# Altium PCB 底板20160428.PcbDoc (part 1 of 5)
Units mm, origin at the board's own origin, x right, y up, seen from the top; angles counter-clockwise.
Board outline 123.72 x 102.71 mm, 2 copper layers (Top Layer, Bottom Layer); 224 components, 227 nets, 768 pads, 282 vias.
Unrouted connection lines stored in the file: 2.
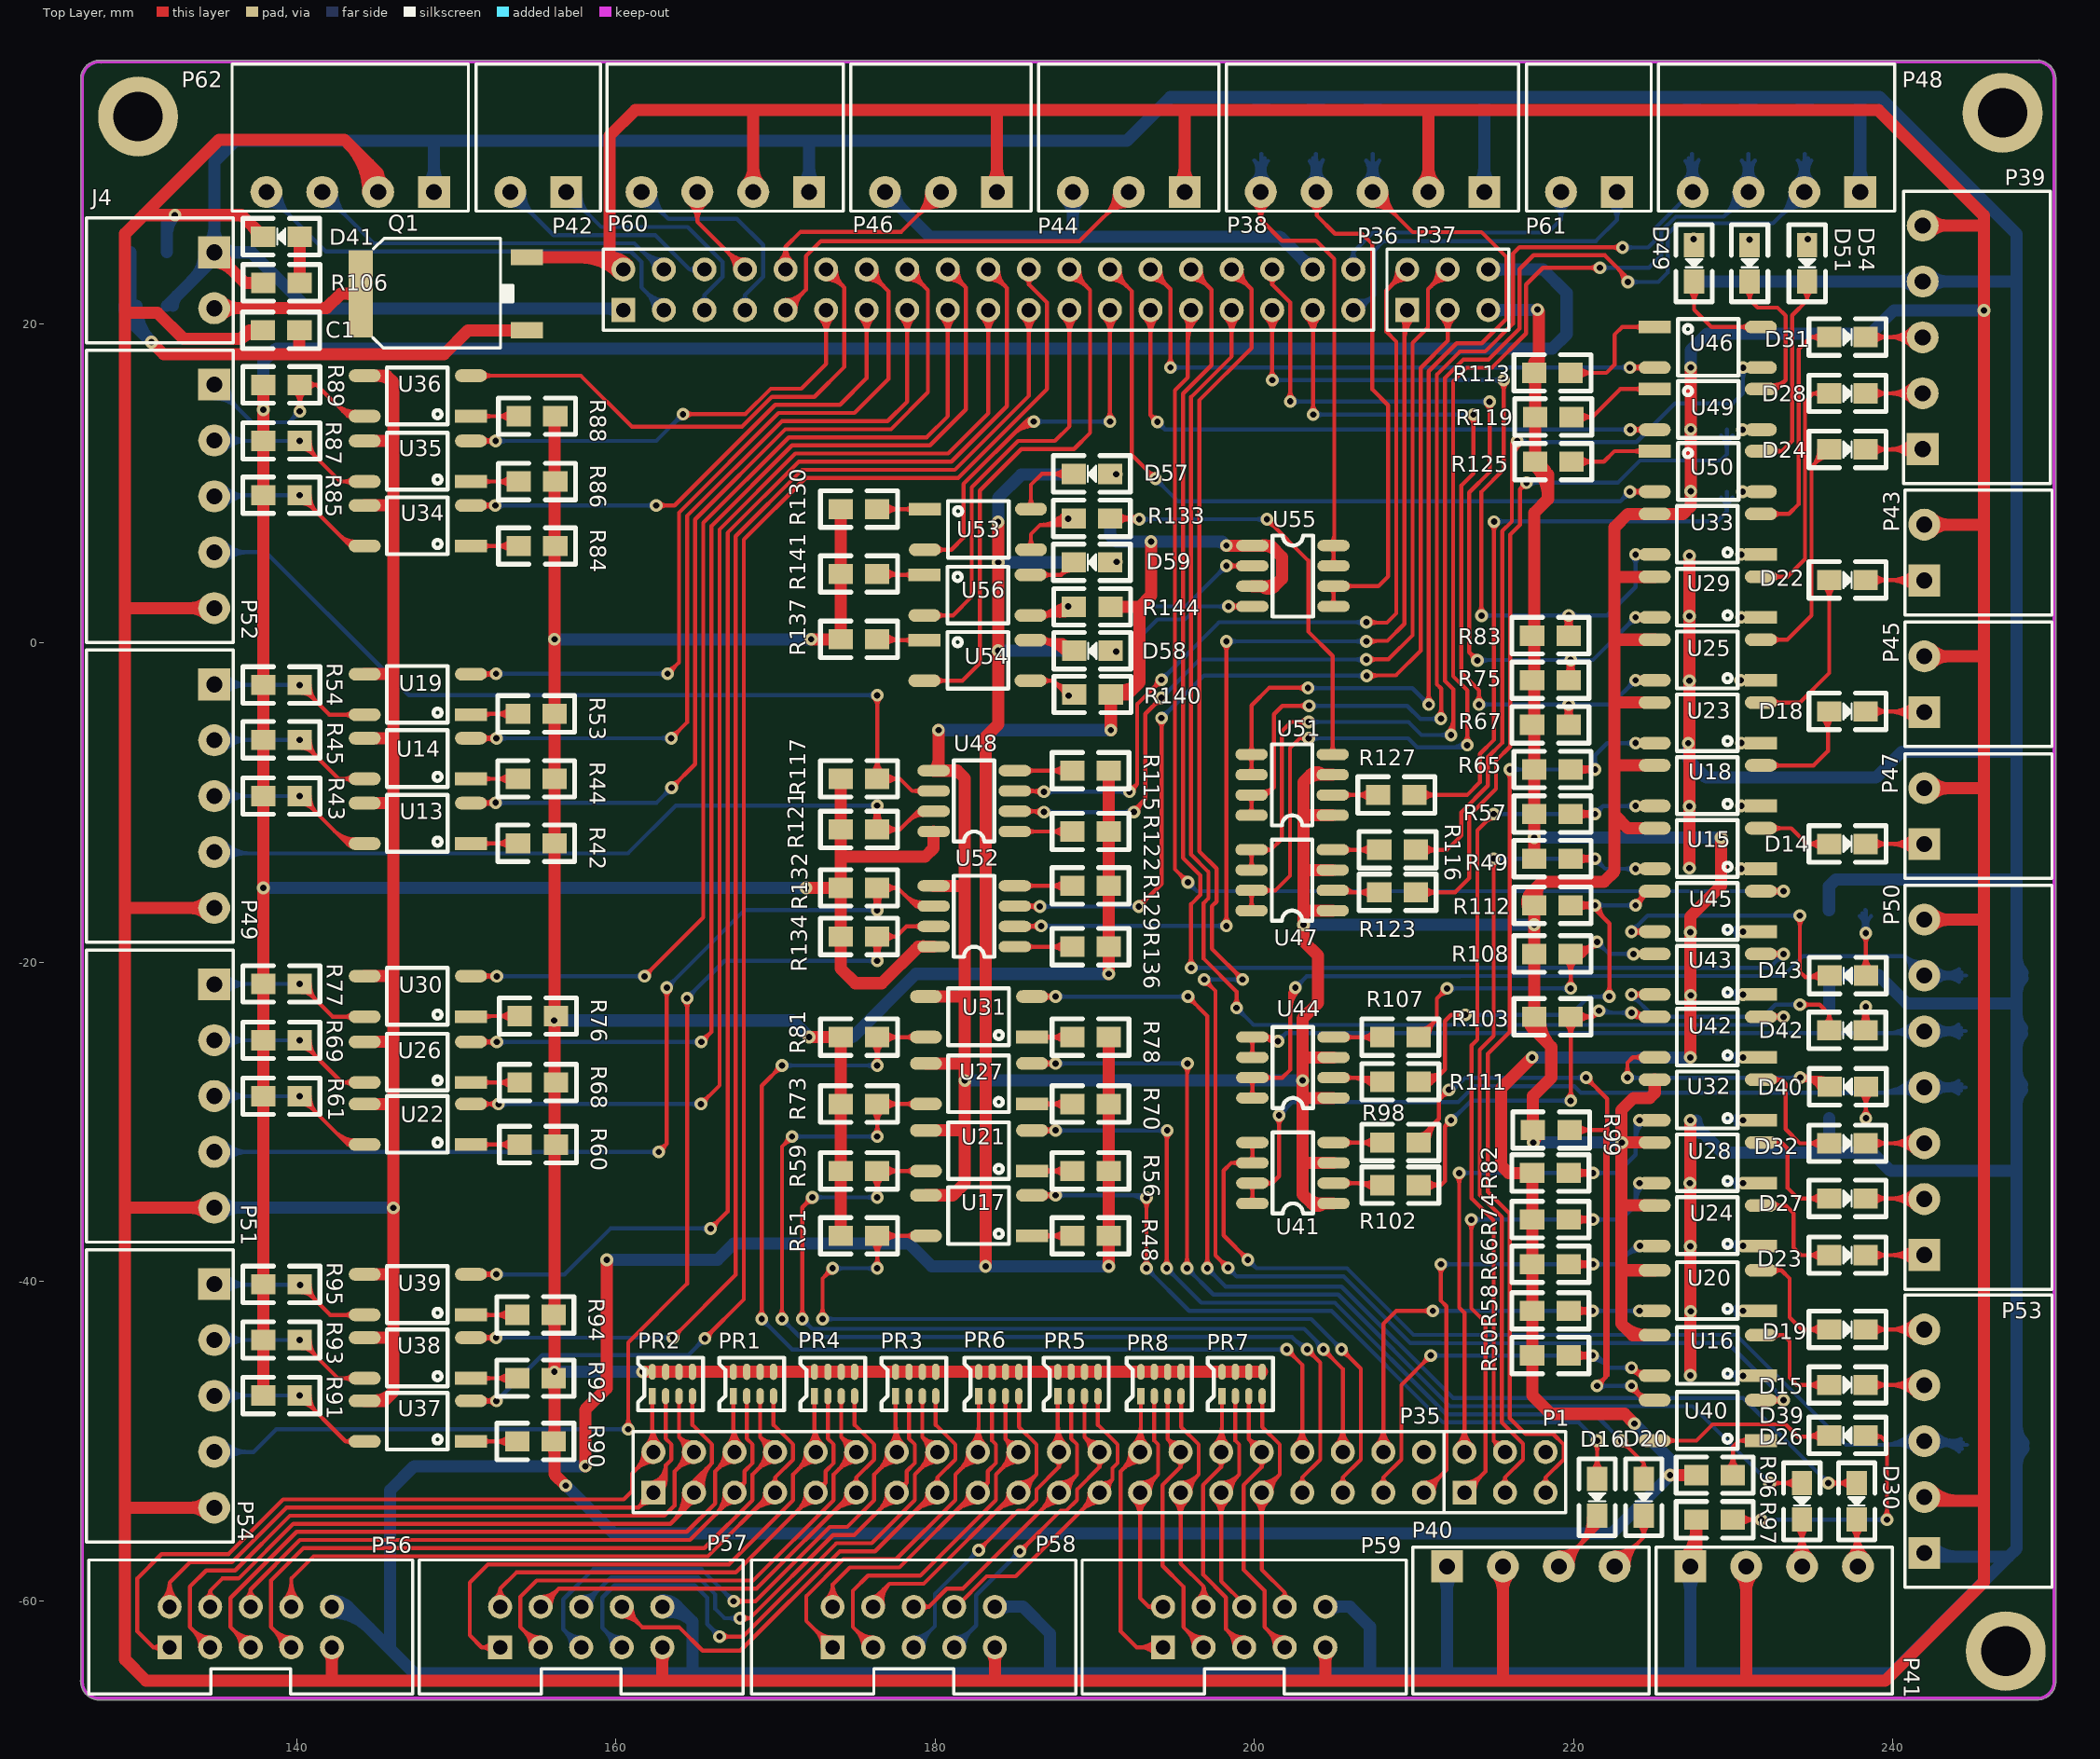
[diagram p0: Top Layer view]
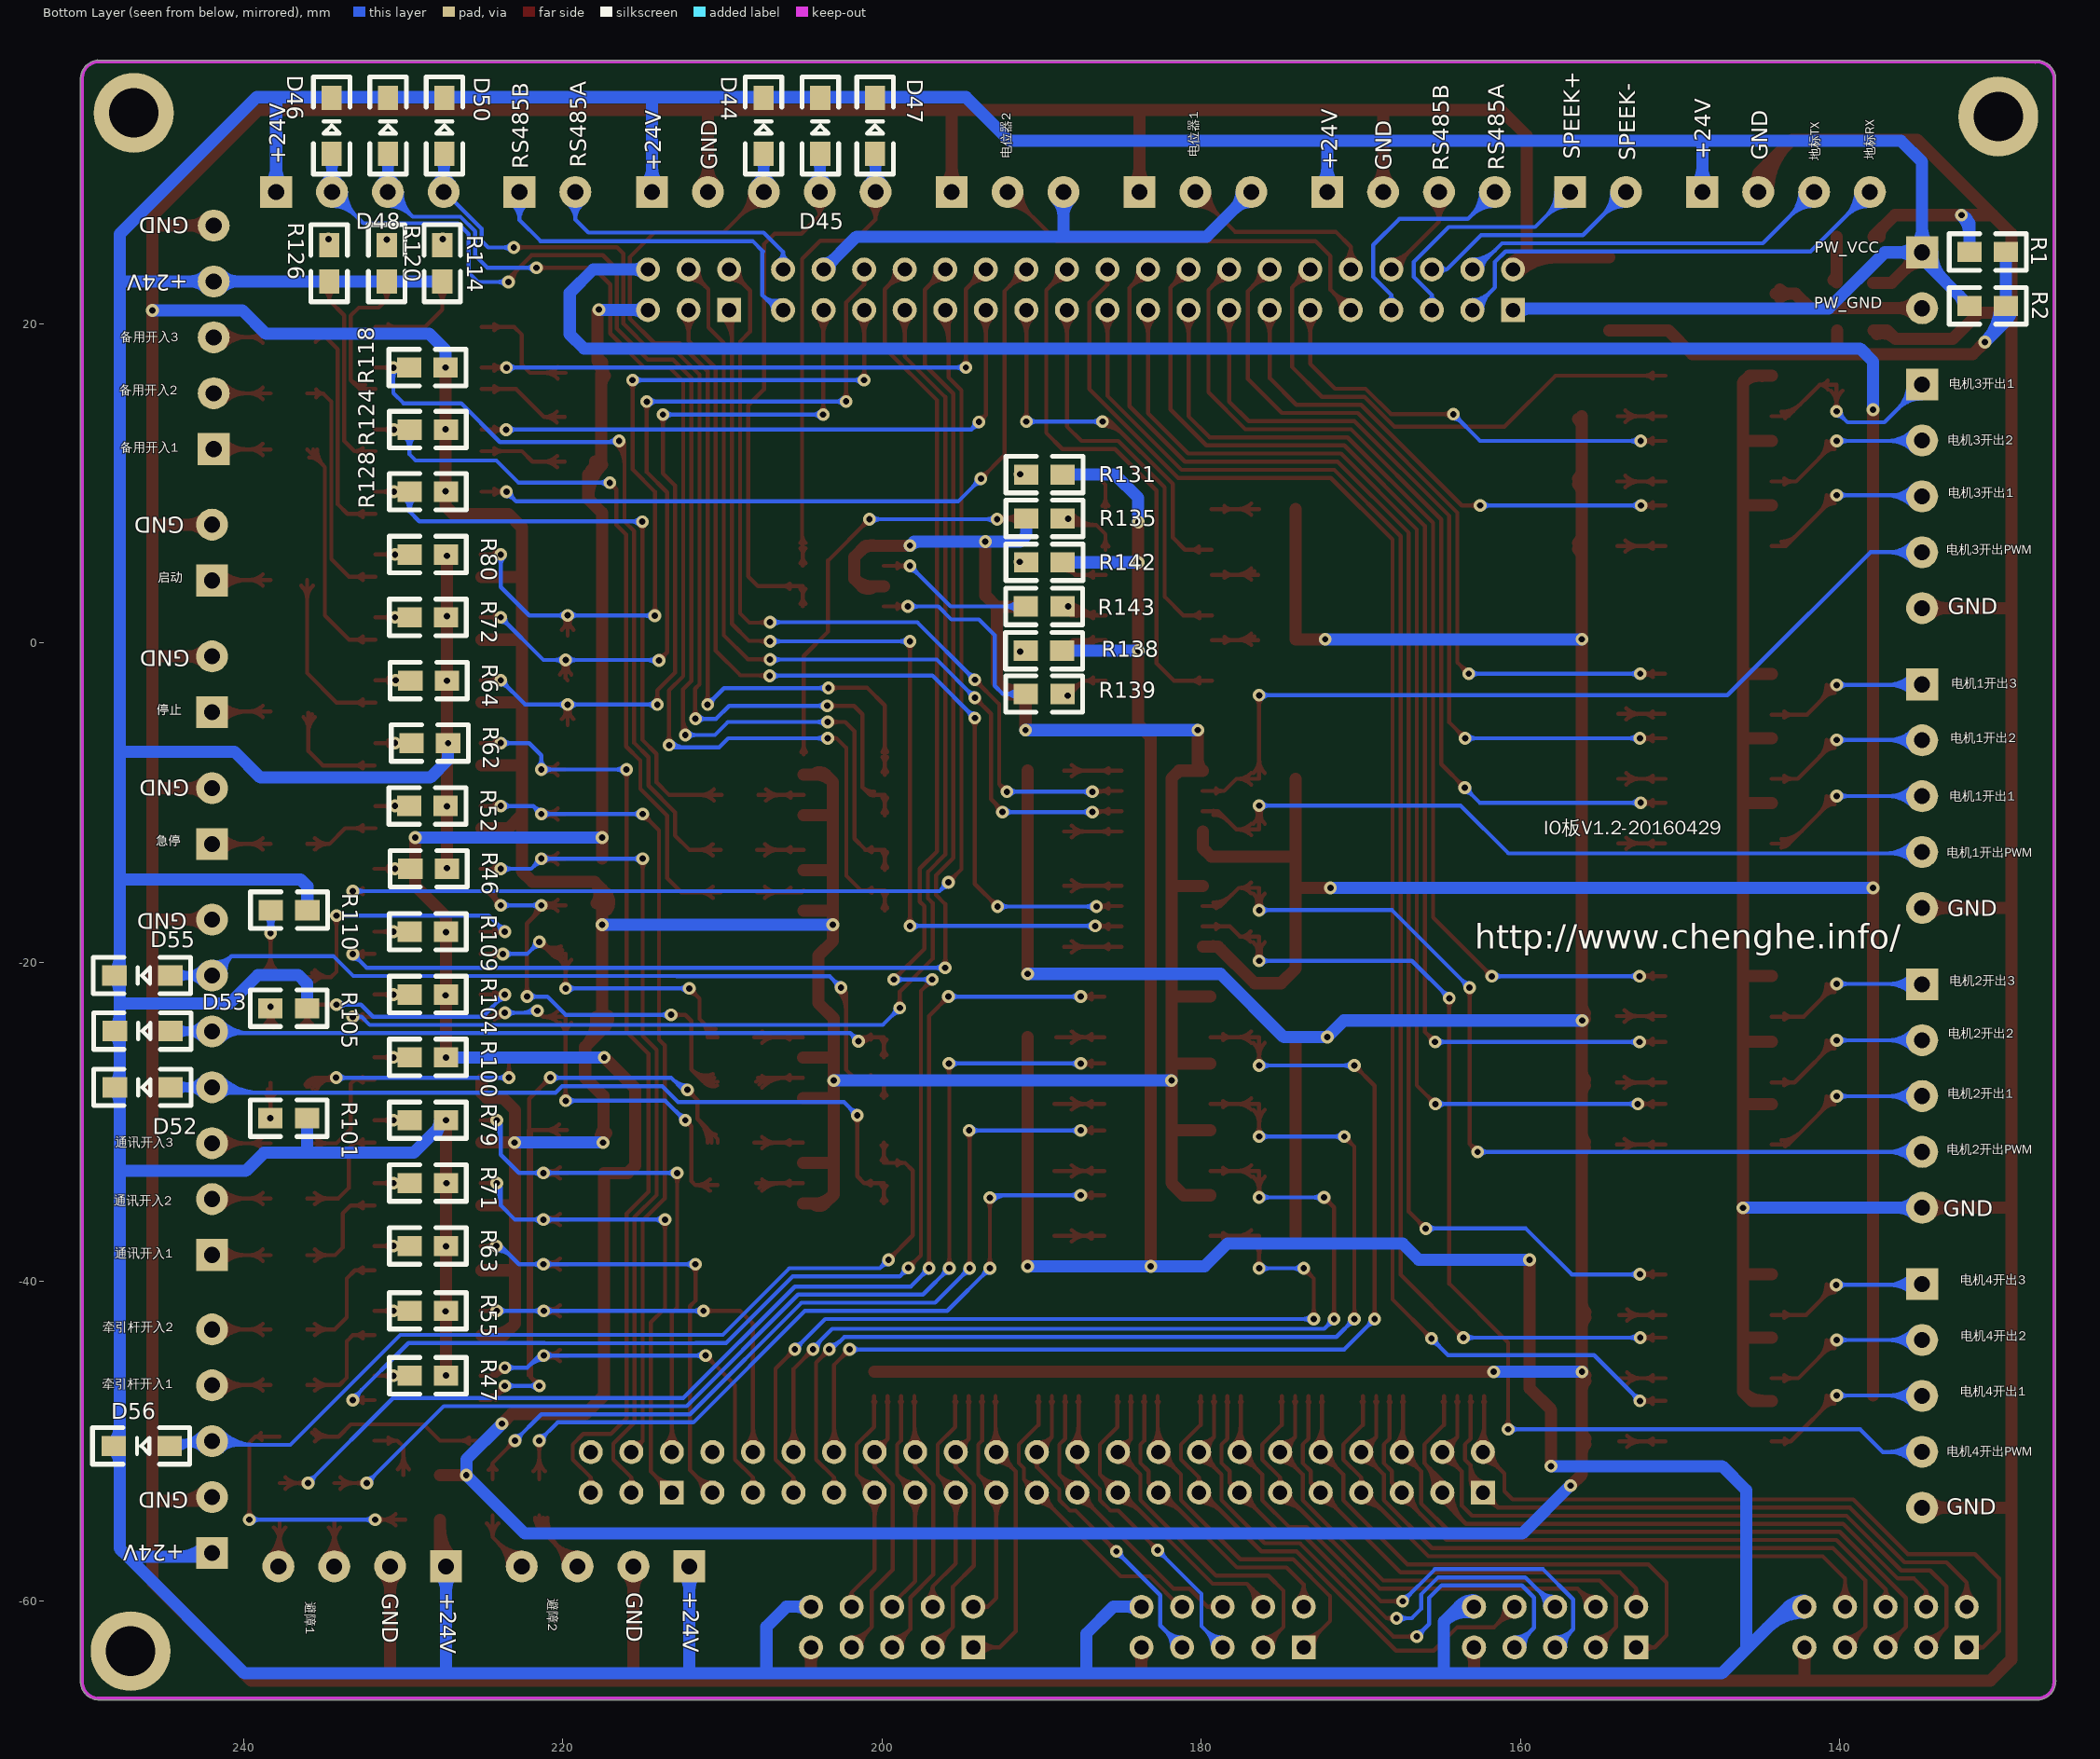
[diagram p1: Bottom Layer view, seen from below]

## Layer stack, top to bottom
Top Layer: signal copper 0.0356
Dielectric: dielectric 0.32, FR-4, Dk 4.8
Bottom Layer: signal copper 0.0356

## Board outline
126.483,-64.918 ccw(c127.645,-65.04) 127.489,-66.198 ccw(c127.519,-66.102) 127.519,-66.202 248.915,-66.202 ccw(c249.031,-65.04) 250.193,-65.161 ccw(c250.094,-65.151) 250.194,-65.151 250.194,35.303 ccw(c249.026,35.341) 250.195,35.341 ccw(c249.026,35.341) 250.194,35.379 250.194,35.428 ccw(c250.094,35.428) 250.189,35.461 ccw(c249.026,35.341) 249.148,36.503 ccw(c249.138,36.403) 249.106,36.499 127.533,36.499 ccw(c127.533,36.398) 127.47,36.476 ccw(c127.651,35.322) 126.489,35.443 ccw(c126.588,35.433) 126.493,35.401 126.493,-64.883 ccw(c126.583,-64.928)

## Design rules (kind name [scope] priority, off if disabled: settings)
Clearance [All] p1: gap=0.152
HoleToHoleClearance [All] p1: gap=0.152 allowstackedmicrovias=TRUE
MinimumSolderMaskSliver [All] p1: minsoldermaskwidth=0.051
PolygonConnect [All] p1: connectstyle=Relief reliefconductorwidth=0.254 reliefentries=4 polygonreliefangle="90 Angle"
RoutingVias [All] p1: holewidth=0.711 width=1.27 viastyle="Through Hole" minholewidth=0.711 minwidth=1.27 maxholewidth=0.711 maxwidth=1.27
SilkToSilkClearance [All] p1: silktosilkclearance=-1
SilkscreenOverComponentPads [All] p1: minsilkscreentomaskgap=-1
SolderMaskExpansion [All] p1: expansion=0.102
Width [All] p1: maxlimit=1.27 minlimit=0.254 preferedwidth=0.254
24 further rules are at their usual default settings.

## Components (designator, comment, footprint, x,y, rotation, side; value= is the part's Value field where it differs from the comment)
C1 "104" 0805 137.897,19.583 r0 top
D14 "" LED 236.017,-12.598 r0 top
D15 "" LED 236.017,-46.482 r0 top
D16 "" LED 221.463,-52.375 r270 top
D18 "" LED 236.017,-4.293 r0 top
D19 "" LED 236.017,-43.002 r0 top
D20 "" LED 224.384,-52.375 r270 top
D22 "" LED 236.017,3.937 r0 top
D23 "" LED 236.017,-38.354 r0 top
D24 "" LED 236.017,12.116 r0 top
D26 "" LED 234.29,-52.629 r270 top
D27 "" LED 236.017,-34.798 r0 top
D28 "" LED 236.017,15.621 r0 top
D30 "" LED 237.719,-52.629 r270 top
D31 "" LED 236.017,19.152 r0 top
D32 "" LED 236.017,-31.344 r0 top
D39 "" LED 238.287,-49.632 r180 top
D40 "" LED 238.303,-27.788 r180 top
D41 "" LED 140.183,25.451 r180 top
D42 "" LED 238.277,-24.257 r180 top
D43 "" LED 238.303,-20.828 r180 top
D44 "" DIDOE 207.416,30.632 r90 bottom
D45 "" DIDOE 203.86,30.632 r90 bottom
D46 "" DIDOE 234.467,30.632 r90 bottom
D47 "" DIDOE 200.431,30.632 r90 bottom
D48 "" DIDOE 230.937,30.632 r90 bottom
D49 "" LED 227.533,24.917 r270 top
D50 "" DIDOE 227.406,30.632 r90 bottom
D51 "" LED 231.013,24.917 r270 top
D52 "" DIDOE 244.551,-27.838 r0 bottom
D53 "" DIDOE 244.551,-24.308 r0 bottom
D54 "" LED 234.62,24.917 r270 top
D55 "" DIDOE 244.577,-20.828 r0 bottom
D56 "" DIDOE 244.627,-50.292 r0 bottom
D57 "" LED 190.957,10.592 r180 top
D58 "" LED 190.983,-0.483 r180 top
D59 "" LED 190.957,5.055 r180 top
J4 "CON2" DZ-2-3.5 134.849,24.46 r270 top
P1 "Header 3X2H" HDR2X3 213.157,-53.213 r0 top locked
P35 "MHDR2X20" DIP-2X20 162.357,-53.213 r0 top locked
P36 "MHDR2X19" DIP-2X19 160.477,20.853 r0 top locked
P37 "Header 3X2H" HDR2X3 209.575,20.853 r0 top
P38 "输出备用" DZ-5-3.5 214.401,28.245 r180 top
P39 "输入备用" DZ-5-3.5 241.859,12.141 r90 top
P40 "避障2" DZ-4-3.5 212.065,-57.836 r0 top
P41 "避障1" DZ-4-3.5 227.305,-57.836 r0 top
P42 "喇叭" DZ-2-3.5 156.896,28.245 r180 top
P43 "启动" DZ-2-3.5 241.96,3.912 r90 top
P44 "电位器1" DZ-3-3.5 195.631,28.245 r180 top
P45 "停止" DZ-2-3.5 241.96,-4.343 r90 top
P46 "电位器2" DZ-3-3.5 183.871,28.245 r180 top
P47 "急停" DZ-2-3.5 241.96,-12.598 r90 top
P48 "三色灯" DZ-4-3.5 237.947,28.245 r180 top
P49 "电机1" DZ-5-3.5 134.849,-2.599 r270 top
P50 "通讯IO" DZ-7-3.5 241.96,-38.329 r90 top
P51 "电机2" DZ-5-3.5 134.849,-21.378 r270 top
P52 "电机3" DZ-5-3.5 134.849,16.181 r270 top
P53 "牵引杆" DZ-5-3.5 241.96,-56.998 r90 top
P54 "电机4" DZ-5-3.5 134.849,-40.157 r270 top
P56 "磁导航1" HDR2X5 132.055,-62.906 r0 top
P57 "磁导航2" HDR2X5 152.756,-62.906 r0 top
P58 "磁导航3" HDR2X5 173.584,-62.906 r0 top
P59 "磁导航4" HDR2X5 194.285,-62.906 r0 top
P60 "触摸屏RS485" DZ-4-3.5 172.11,28.245 r180 top
P61 "应用板通讯" DZ-2-3.5 222.707,28.245 r180 top
P62 "RFID_RS232" DZ-4-3.5 148.615,28.245 r180 top
PR1 "PZ" SOP8 167.361,-47.041 r90 top
PR2 "PZ" SOP8 162.281,-47.041 r90 top
PR3 "PZ" SOP8 177.521,-47.041 r90 top
PR4 "PZ" SOP8 172.441,-47.041 r90 top
PR5 "PZ" SOP8 187.681,-47.041 r90 top
PR6 "PZ" SOP8 182.728,-47.041 r90 top
PR7 "PZ" SOP8 197.968,-47.041 r90 top
PR8 "PZ" SOP8 192.888,-47.041 r90 top
Q1 "IRFR1205" TO-252AA 154.432,19.583 r90 top
R1 "1k" 0805 129.591,24.486 r0 bottom
R2 "2k" 0805 129.591,21.107 r0 bottom
R42 "102" 0805 153.873,-12.548 r0 top
R43 "472" 0805 140.2,-9.594 r180 top
R44 "102" 0805 153.873,-8.509 r0 top
R45 "472" 0805 140.2,-6.071 r180 top
R46 "472" 0805 229.54,-14.148 r180 bottom
R47 "472" 0805 229.591,-45.898 r180 bottom
R48 "472" 0805 188.595,-37.135 r0 top
R49 "102" 0805 219.812,-13.513 r180 top
R50 "102" 0805 219.685,-44.628 r180 top
R51 "102" 0805 176.378,-37.135 r180 top
R52 "472" 0805 229.616,-10.211 r180 bottom
R53 "102" 0805 153.873,-4.445 r0 top
R54 "472" 0805 140.2,-2.635 r180 top
R55 "472" 0805 229.591,-41.834 r180 bottom
R56 "472" 0805 188.595,-33.071 r0 top
R57 "102" 0805 219.812,-10.719 r180 top
R58 "102" 0805 219.685,-41.834 r180 top
R59 "102" 0805 176.378,-33.071 r180 top
R60 "102" 0805 153.975,-31.42 r0 top
R61 "472" 0805 140.2,-28.39 r180 top
R62 "472" 0805 229.464,-6.274 r180 bottom
R63 "472" 0805 229.591,-37.77 r180 bottom
R64 "472" 0805 229.54,-2.362 r180 bottom
R65 "102" 0805 219.812,-7.925 r180 top
R66 "102" 0805 219.685,-38.913 r180 top
R67 "102" 0805 219.685,-5.131 r180 top
R68 "102" 0805 153.975,-27.534 r0 top
R69 "472" 0805 140.2,-24.885 r180 top
R70 "472" 0805 188.595,-28.88 r0 top
R71 "472" 0805 229.591,-33.833 r180 bottom
R72 "472" 0805 229.591,1.6 r180 bottom
R73 "102" 0805 176.378,-28.88 r180 top
R74 "102" 0805 219.685,-36.119 r180 top
R75 "102" 0805 219.685,-2.337 r180 top
R76 "102" 0805 153.975,-23.368 r0 top
R77 "472" 0805 140.2,-21.355 r180 top
R78 "472" 0805 188.595,-24.689 r0 top
R79 "472" 0805 229.591,-29.896 r180 bottom
R80 "472" 0805 229.591,5.537 r180 bottom
R81 "102" 0805 176.378,-24.689 r180 top
R82 "102" 0805 219.685,-33.198 r180 top
R83 "102" 0805 219.685,0.457 r180 top
R84 "102" 0805 153.924,6.071 r0 top
R85 "472" 0805 140.2,9.252 r180 top
R86 "102" 0805 153.924,10.109 r0 top
R87 "472" 0805 140.2,12.656 r180 top
R88 "102" 0805 153.924,14.199 r0 top
R89 "472" 0805 140.2,16.161 r180 top
R90 "102" 0805 153.822,-50.013 r0 top
R91 "472" 0805 140.2,-47.136 r180 top
R92 "102" 0805 153.822,-46.05 r0 top
R93 "472" 0805 140.2,-43.656 r180 top
R94 "102" 0805 153.822,-42.088 r0 top
R95 "472" 0805 140.2,-40.176 r180 top
R96 "102" 0805 229.972,-52.121 r180 top
R97 "472" 0805 229.972,-54.915 r180 top
R98 "102" 0805 208.001,-31.293 r0 top
R99 "472" 0805 217.449,-30.505 r0 top
R100 "102" 0805 229.591,-25.959 r180 bottom
R101 "472" 0805 238.303,-29.769 r180 bottom
R102 "102" 0805 208.001,-33.96 r0 top
R103 "472" 0805 217.526,-23.419 r0 top
R104 "102" 0805 229.591,-22.022 r180 bottom
R105 "472" 0805 238.303,-22.885 r180 bottom
R106 "472" 0805 137.922,22.555 r0 top
R107 "102" 0805 208.001,-24.689 r0 top
R108 "472" 0805 217.526,-19.482 r0 top
R109 "102" 0805 229.591,-18.085 r180 bottom
R110 "472" 0805 238.277,-16.739 r180 bottom
R111 "102" 0805 208.001,-27.483 r0 top
R112 "472" 0805 217.526,-16.434 r0 top
R113 "102" 0805 219.812,16.916 r180 top
R114 "472" 0805 227.54,24.925 r270 bottom
R115 "330R" 0805 188.595,-8.001 r0 top
R116 "102" 0805 207.823,-12.954 r0 top
R117 "202" 0805 176.378,-8.509 r180 top
R118 "472" 0805 227.33,17.247 r0 bottom
R119 "102" 0805 219.862,14.148 r180 top
R120 "472" 0805 231.02,24.925 r270 bottom
R121 "202" 0805 174.092,-11.684 r0 top
R122 "330R" 0805 188.595,-11.811 r0 top
R123 "102" 0805 207.823,-15.621 r0 top
R124 "472" 0805 227.305,13.36 r0 bottom
R125 "102" 0805 219.862,11.354 r180 top
R126 "472" 0805 234.627,24.925 r270 bottom
R127 "102" 0805 207.747,-9.525 r0 top
R128 "472" 0805 227.305,9.474 r0 bottom
R129 "330R" 0805 188.595,-15.215 r0 top
R130 "102" 0805 176.378,8.382 r180 top
R131 "472" 0805 190.965,10.541 r180 bottom
R132 "202" 0805 176.378,-15.342 r180 top
R133 "102" 0805 190.965,7.798 r180 top
R134 "202" 0805 174.092,-18.39 r0 top
R135 "472" 0805 190.965,7.798 r180 bottom
R136 "330R" 0805 188.595,-19.025 r0 top
R137 "102" 0805 176.378,0.229 r180 top
R138 "472" 0805 190.99,-0.489 r180 bottom
R139 "102" 0805 190.983,-3.2 r180 bottom
R140 "472" 0805 191.008,-3.226 r180 top
R141 "102" 0805 176.378,4.318 r180 top
R142 "472" 0805 190.965,5.048 r180 bottom
R143 "102" 0805 190.983,2.286 r180 bottom
R144 "472" 0805 190.983,2.261 r180 top
U13 "TLP127" TLP127 151.511,-12.573 r180 top
U14 "TLP127" TLP127 151.511,-8.509 r180 top
U15 "TLP127" TLP127 232.313,-14.148 r180 top
U16 "TLP127" TLP127 232.313,-45.898 r180 top
U17 "TLP127" TLP127 186.665,-37.135 r180 top
U18 "TLP127" TLP127 232.313,-10.211 r180 top
U19 "TLP127" TLP127 151.511,-4.496 r180 top
U20 "TLP127" TLP127 232.313,-41.834 r180 top
U21 "TLP127" TLP127 186.665,-33.071 r180 top
U22 "TLP127" TLP127 151.511,-31.42 r180 top
U23 "TLP127" TLP127 232.313,-6.274 r180 top
U24 "TLP127" TLP127 232.313,-37.77 r180 top
U25 "TLP127" TLP127 232.313,-2.337 r180 top
U26 "TLP127" TLP127 151.511,-27.527 r180 top
U27 "TLP127" TLP127 186.665,-28.88 r180 top
U28 "TLP127" TLP127 232.313,-33.833 r180 top
U29 "TLP127" TLP127 232.313,1.6 r180 top
U30 "TLP127" TLP127 151.511,-23.407 r180 top
U31 "TLP127" TLP127 186.665,-24.689 r180 top
U32 "TLP127" TLP127 232.313,-29.896 r180 top
U33 "TLP127" TLP127 232.313,5.537 r180 top
U34 "TLP127" TLP127 151.511,6.071 r180 top
U35 "TLP127" TLP127 151.511,10.109 r180 top
U36 "TLP127" TLP127 151.511,14.199 r180 top
U37 "TLP127" TLP127 151.511,-50.013 r180 top
U38 "TLP127" TLP127 151.511,-46.055 r180 top
U39 "TLP127" TLP127 151.511,-42.088 r180 top
U40 "TLP127" TLP127 232.313,-49.962 r180 top
U41 "AF4920GW" SO-8 204.953,-35.103 r180 top
U42 "TLP127" TLP127 232.313,-25.959 r180 top
U43 "TLP127" TLP127 232.313,-22.022 r180 top
U44 "AF4920GW" SO-8 204.953,-28.499 r180 top
U45 "TLP127" TLP127 232.313,-18.085 r180 top
U46 "TLP127" TLP127 224.485,19.787 r0 top
U47 "AF4920GW" SO-8 204.902,-16.764 r180 top
U48 "HCPL0630" SO-8 184.988,-11.811 r180 top
U49 "TLP127" TLP127 224.485,15.9 r0 top
U50 "TLP127" TLP127 224.485,12.014 r0 top
U51 "AF4920GW" SO-8 204.902,-10.795 r180 top
U52 "HCPL0630" SO-8 184.988,-19.025 r180 top
U53 "TLP127" TLP127 178.765,8.382 r0 top
U54 "TLP127" TLP127 178.74,0.178 r0 top
U55 "AF4920GW" SO-8 199.873,6.096 r0 top
U56 "TLP127" TLP127 178.74,4.267 r0 top

## Footprints (in the part's own frame and the unit in brackets; to place one, negate y for a bottom-side part, rotate by r counter-clockwise, add the part's x,y. Pads: shape width x height; smd on the part's side, far side on the other; paste and mask are expansions set on the pad)
0805 [mil]
  rect 60x50 smd: 1(0,0) 2(90,0)
  silkscreen extent -50,-45 140,45
DIDOE [mil]
  rect 60x50 smd: 1(0,0) 2(137.8,0)
  silkscreen extent -50,-45 190,45
DIP-2X19 [mm]
  rect 1.5x1.5 hole 0.9: 1(0,0)
  round 1.5 hole 0.9: 2(0,2.54) 3(2.54,0) 4(2.54,2.54) 5(5.08,0) 6(5.08,2.54) 7(7.62,0) 8(7.62,2.54) 9(10.16,0) 10(10.16,2.54) 11(12.7,0) 12(12.7,2.54) 13(15.24,0) 14(15.24,2.54) 15(17.78,0) 16(17.78,2.54) 17(20.32,0) 18(20.32,2.54) 19(22.86,0) 20(22.86,2.54) 21(25.4,0) 22(25.4,2.54) 23(27.94,0) 24(27.94,2.54) 25(30.48,0) 26(30.48,2.54) 27(33.02,0) 28(33.02,2.54) 29(35.56,0) 30(35.56,2.54) 31(38.1,0) 32(38.1,2.54) 33(40.64,0) 34(40.64,2.54) 35(43.18,0) 36(43.18,2.54) 37(45.72,0) 38(45.72,2.54)
  silkscreen extent -1.27,-1.27 46.99,3.81
DIP-2X20 [mm]
  rect 1.5x1.5 hole 0.9: 1(0,0)
  round 1.5 hole 0.9: 2(0,2.54) 3(2.54,0) 4(2.54,2.54) 5(5.08,0) 6(5.08,2.54) 7(7.62,0) 8(7.62,2.54) 9(10.16,0) 10(10.16,2.54) 11(12.7,0) 12(12.7,2.54) 13(15.24,0) 14(15.24,2.54) 15(17.78,0) 16(17.78,2.54) 17(20.32,0) 18(20.32,2.54) 19(22.86,0) 20(22.86,2.54) 21(25.4,0) 22(25.4,2.54) 23(27.94,0) 24(27.94,2.54) 25(30.48,0) 26(30.48,2.54) 27(33.02,0) 28(33.02,2.54) 29(35.56,0) 30(35.56,2.54) 31(38.1,0) 32(38.1,2.54) 33(40.64,0) 34(40.64,2.54) 35(43.18,0) 36(43.18,2.54) 37(45.72,0) 38(45.72,2.54) 39(48.26,0) 40(48.26,2.54)
  silkscreen extent -1.27,-1.27 49.53,3.81
DZ-2-3.5 [mm]
  rect 2x2 hole 1: 1(0,0)
  round 2 hole 1: 2(3.5,0)
  silkscreen extent -2.15,-8 5.65,1.2
DZ-3-3.5 [mm]
  rect 2x2 hole 1: 1(0,0)
  round 2 hole 1: 2(3.5,0) 3(7,0)
  silkscreen extent -2.15,-8 9.15,1.2
DZ-4-3.5 [mm]
  rect 2x2 hole 1: 1(0,0)
  round 2 hole 1: 2(3.5,0) 3(7,0) 4(10.5,0)
  silkscreen extent -2.15,-8 12.65,1.2
DZ-5-3.5 [mm]
  rect 2x2 hole 1: 1(0,0)
  round 2 hole 1: 2(3.5,0) 3(7,0) 4(10.5,0) 5(14,0)
  silkscreen extent -2.15,-8 16.15,1.2
DZ-7-3.5 [mm]
  rect 2x2 hole 1: 1(0,0)
  round 2 hole 1: 2(3.5,0) 3(7,0) 4(10.5,0) 5(14,0) 6(17.5,0) 7(21,0)
  silkscreen extent -2.15,-8 23.15,1.2
HDR2X3 [mm]
  rect 1.5x1.5 hole 0.9: 1(0,0)
  round 1.5 hole 0.9: 2(0,2.54) 3(2.54,0) 4(2.54,2.54) 5(5.08,0) 6(5.08,2.54)
  silkscreen extent -1.27,-1.27 6.35,3.81
HDR2X5 [mm] "Connect"
  rect 1.5x1.5 hole 0.9: 1(0,0)
  round 1.5 hole 0.9: 2(0,2.54) 3(2.54,0) 4(2.54,2.54) 5(5.08,0) 6(5.08,2.54) 7(7.62,0) 8(7.62,2.54) 9(10.16,0) 10(10.16,2.54)
  silkscreen extent -5.07,-2.93 15.23,5.47
LED [mil]
  rect 60x50 smd: 1(-0.31,0.27) 2(89.69,0.27)
  silkscreen extent -50,-45 140,45
SO-8 [mil]
  oval 80x28 smd: 1(0,0) 2(0,-50) 3(0,-100) 4(0,-150) 5(200,-150) 6(200,-100) 7(200,-50) 8(200,0)
  silkscreen extent 50,-175 150,25
SOP8 [mil]
  rect 40x18 smd: 1(-5.35,-0.18)
  oval 40x18 smd: 2(-5.35,-33.18) 3(-5.35,-66.18) 4(-5.35,-99.18) 5(54.65,-99.18) 6(54.65,-66.18) 7(54.65,-33.18)
  oval 39x18 smd: 8(54.65,-0.18)
  silkscreen extent -40,-126 90,35
TLP127 [mm]
  rect 2x0.8 smd: 1(0.589,-0.001)
  oval 2x0.8 smd: 3(0.589,-2.541) 4(7.239,-2.541) 6(7.239,-0.001)
  silkscreen extent 2.04,-3.05 5.85,0.51
TO-252AA [mm]
  rect 1x2 smd: 1(0,0) 3(4.57,0)
  rect 5.46x1.5 smd: 2(2.286,10.414)
  silkscreen extent -1.12,0.89 5.77,9.65

## Part data
D14 D15 D16 D18 D19 D20 D22 D23 D24 D26 D27 D28 D30 D31 D32: library part LED0, "Typical INFRARED GaAs"
D44 D45 D46 D47 D48 D50 D52 D53 D55 D56: library part DIODE, "Di"
J4: "Connec"
P1 P37: "Header, 3-Pin, Dual row, Right An"
P35: "Header, 20-Pin, Dual"
P36: "Header, 19-Pin, Dual"
P38 P39 P49 P51 P52 P53 P54: library part "Header 5", "Header, 5-"
P40 P41 P48 P60 P62: library part "Header 4", "Header, 4-"
P42 P43 P45 P47 P61: library part "Header 2", "Header, 2-"
P44 P46: library part "Header 3", "Header, 3-"
P50: library part "Header 7", "Header, 7-"
P56 P57 P58 P59: library part "Header 5X2H", "Header, 5-Pin, Dual row, Right Angle"
Q1: library part NMOS-2, "N-Channel Power MOS"
R98 R102 R106 R107 R111 R116 R123 R127 R133 R139 R143: library part R
U13 U14 U15 U16 U17 U18 U19 U20 U21 U22 U23 U24 U25 U26 U27 U28 U29 U30 U31 U32 U33 U34 U35 U36 U37 U38 U39 U40 U42 U43 U45 U46 U49 U50 U53 U54 U56: library part TLP
U41 U44 U47 U51 U55: library part AF49
U48 U52: library part HCPL0

## Free pads (board coordinates)
  round 5 hole 3.1: 5(130.073,32.969) 6(246.863,33.198) 7(247.066,-63.144)

## Via types
v1: diameter 0.8, hole 0.4, Top Layer to Bottom Layer, 282 vias

## Nets (pads, with @x,y where several pads share a name; then routed paths per layer and width w, separated by ;. In a path a pad name is that pad's centre, name@x,y a point inside that pad or via, vN(x,y) a via of type N, cw(c..) or ccw(c..) an arc to the next point about the centre after c; other vN are vias at no path point)
BY_KC1: P36.25 U53.3 | length 35.2
  Top Layer w0.254: U53.3@179.354,5.841 181.025,5.841 181.788,6.604 181.788,9.961 185.696,13.868 ; U53.3@180.147,5.648 cw(c180.613,5.182) 180.613,5.841 cw(c180.613,6.5) U53.3@180.147,6.034 ; 184.886,13.058 cw(c186.182,11.762) v1@186.182,13.595 ; 185.319,13.492 cw(c186.182,12.629) v1@186.182,13.849 ; 185.753,13.926 cw(c186.182,13.497) v1@186.182,14.103 ; v1@185.949,13.726 ccw(c185.696,13.572) 185.696,13.868 ; v1@185.949,14.011 cw(c185.696,14.165) 185.696,13.868 ; v1(186.182,13.868) 185.696,13.868 ; P36.25@190.517,20.413 cw(c189.453,19.349) 190.957,19.349 cw(c192.461,19.349) P36.25@191.398,20.413 ; P36.25@190.696,20.592 cw(c190.066,19.963) 190.957,19.963 cw(c191.848,19.963) P36.25@191.218,20.592 ; v1@190.764,14.061 ccw(c190.298,14.527) 190.957,14.527 ccw(c191.616,14.527) v1@191.15,14.061 ; v1@190.957,13.894 P36.25@190.957,20.853
  Bottom Layer w0.254: v1(186.182,13.868) v1(190.957,13.868) ; v1@186.375,13.675 cw(c186.841,13.209) 186.841,13.868 cw(c186.841,14.527) v1@186.375,14.061 ; v1@190.764,13.675 ccw(c190.298,13.209) 190.298,13.868 ccw(c190.298,14.527) v1@190.764,14.061
BY_KC2: P36.24 U54.3 | length 38.7
  Top Layer w0.254: U54.3@179.329,-2.363 181.711,-2.363 182.804,-1.27 182.804,9.54 185.405,12.141 188.697,12.141 189.713,13.157 189.713,22.098 P36.24@188.417,23.393 ; U54.3@180.122,-2.556 cw(c180.588,-3.022) 180.588,-2.363 cw(c180.588,-1.704) U54.3@180.122,-2.17 ; P36.24@188.417,22.77 cw(c188.417,21.266) 189.481,22.33 cw(c190.544,23.393) P36.24@189.04,23.393 ; P36.24@188.417,23.024 cw(c188.417,22.134) 189.047,22.763 cw(c189.677,23.393) P36.24@188.786,23.393
BY_KC3: P36.23 U56.3 | length 30.1
  Top Layer w0.254: U56.3@179.329,1.726 181.126,1.726 182.296,2.896 182.296,9.75 185.195,12.649 187.503,12.649 188.417,13.564 P36.23@188.417,20.853 ; U56.3@180.122,1.533 cw(c180.588,1.067) 180.588,1.726 cw(c180.588,2.385) U56.3@180.122,1.919 ; P36.23@187.977,20.413 cw(c186.913,19.349) 188.417,19.349 cw(c189.921,19.349) P36.23@188.858,20.413 ; P36.23@188.156,20.592 cw(c187.526,19.963) 188.417,19.963 cw(c189.308,19.963) P36.23@188.678,20.592
BY_KC11: D44.1 P38.3 U51.5 U51.6 | length 83.3
  Top Layer w0.254: U51.6@199.66,-8.093 ccw(c199.27,-7.703) 199.822,-7.703 ccw(c200.374,-7.703) U51.6@199.983,-8.093 ; U51.5@199.66,-7.147 cw(c199.27,-7.537) 199.822,-7.537 cw(c200.374,-7.537) U51.5@199.983,-7.147 ; U51.5@199.66,-6.823 ccw(c199.27,-6.433) 199.822,-6.433 ccw(c200.374,-6.433) U51.5@199.983,-6.823 ; U51.6@199.822,-8.255 U51.5@199.822,-6.985 199.822,-3.912 200.939,-2.794 v1@203.378,-2.794 ; 202.632,-2.794 cw(c202.632,-3.54) v1@203.159,-3.012 ; 202.755,-2.794 ccw(c202.755,-2.222) v1@203.159,-2.626 ; P38.3@207.401,27.372 cw(c207.401,25.264) 208.892,26.754 cw(c210.382,28.245) P38.3@208.274,28.245 ; P38.3@207.401,27.626 cw(c207.401,26.131) 208.458,27.188 cw(c209.515,28.245) P38.3@208.02,28.245 ; P38.3@207.401,28.245 209.916,25.73 214.224,25.73 215.798,24.155 215.798,20.32 214.243,18.764 212.672,18.764 210.922,17.014 v1(210.922,-3.861) ; v1@210.729,-3.668 ccw(c210.263,-3.202) 210.922,-3.202 ccw(c211.581,-3.202) v1@211.115,-3.668
  Bottom Layer w0.254: v1(203.352,-2.819) 203.371,-2.838 209.899,-2.838 v1(210.922,-3.861) v1@210.903,-3.88 ; v1@203.545,-3.012 cw(c203.966,-3.433) 203.966,-2.838 ; v1@203.545,-2.626 ccw(c204.057,-2.114) 204.057,-2.838 ; P38.3@206.784,28.862 ccw(c205.258,30.389) D44.1@207.416,30.389 ; P38.3@206.964,28.682 ccw(c205.871,29.775) 207.416,29.775 ; D44.1@206.996,30.22 cw(c206.127,29.632) 207.141,29.36 ; D44.1@207.057,30.146 cw(c206.19,29.279) 207.416,29.279 cw(c208.643,29.279) D44.1@207.776,30.146 ; 207.147,29.383 cw(c208.232,29.093) D44.1@207.67,30.065 ; D44.1@207.162,30.065 cw(c206.633,29.148) 207.656,29.422 ; P38.3@207.416,28.26 D44.1@207.416,30.632 ; 207.416,29.703 ccw(c208.86,29.703) P38.3@207.839,28.682 ; D44.1@207.416,30.316 ccw(c209.473,30.316) P38.3@208.019,28.862 ; 207.67,29.37 cw(c208.62,29.624) D44.1@207.826,30.205 ; v1@210.649,-3.861 ccw(c209.99,-3.861) 210.456,-3.395 ccw(c210.922,-2.929) v1@210.922,-3.588
BY_KC22: D45.1 P38.4 U55.5 U55.6 | length 51.3
  Top Layer w0.254: P38.4@203.487,27.477 cw(c203.111,26.781) 203.901,26.781 ; P38.4@203.607,27.7 cw(c203.341,27.207) 203.901,27.207 cw(c204.462,27.207) P38.4@204.195,27.7 ; P38.4@203.901,28.245 203.901,26.781 ; P38.4@204.316,27.477 ccw(c204.691,26.781) 203.901,26.781 ; U55.5@204.791,2.448 ccw(c204.401,2.838) 204.953,2.838 ccw(c205.504,2.838) U55.5@205.114,2.448 ; U55.6@204.791,3.394 cw(c204.401,3.004) 204.953,3.004 cw(c205.504,3.004) U55.6@205.114,3.394 ; U55.5@204.953,2.286 U55.6@204.953,3.556 207.772,3.556 208.382,4.166 208.382,14.884 207.391,15.875 207.391,24.968 206.731,25.629 205.054,25.629 203.901,26.781 ; U55.6@205.775,3.394 cw(c206.165,3.004) 206.165,3.556 cw(c206.165,4.108) U55.6@205.775,3.718
  Bottom Layer w0.254: P38.4@203.284,28.862 ccw(c201.893,30.253) D45.1@203.86,30.253 ; D45.1@203.46,30.192 cw(c202.728,29.619) 203.626,29.379 ; P38.4@203.464,28.682 ccw(c202.506,29.64) 203.86,29.64 ; D45.1@203.501,30.146 cw(c202.634,29.279) 203.86,29.279 cw(c205.087,29.279) D45.1@204.22,30.146 ; D45.1@203.607,30.065 cw(c203.02,29.047) 204.155,29.351 cw(c205.23,29.639) D45.1@204.29,30.234 ; 203.647,29.456 cw(c204.616,29.196) D45.1@204.114,30.065 ; D45.1@203.66,30.349 cw(c203.23,30.012) D45.1@203.758,29.871 ; P38.4@203.86,28.286 D45.1@203.86,30.632 ; 203.86,29.838 ccw(c205.495,29.838) P38.4@204.339,28.682 ; D45.1@203.86,30.451 ccw(c206.108,30.451) P38.4@204.519,28.862
BY_KC33: D47.1 P38.5 U55.7 U55.8 | length 47.1
  Top Layer w0.254: P38.5@199.885,27.541 cw(c199.139,26.522) 200.401,26.522 ; P38.5@200.035,27.746 cw(c199.506,27.023) 200.401,27.023 cw(c201.297,27.023) P38.5@200.767,27.746 ; P38.5@200.401,28.245 200.401,26.522 ; P38.5@200.918,27.541 ccw(c201.664,26.522) 200.401,26.522 ; U55.7@204.791,4.988 ccw(c204.401,5.378) 204.953,5.378 ccw(c205.504,5.378) U55.7@205.114,4.988 ; U55.8@204.791,5.934 cw(c204.401,5.544) 204.953,5.544 cw(c205.504,5.544) U55.8@205.114,5.934 ; U55.8@204.791,6.258 ccw(c204.278,6.771) 205.003,6.771 ; U55.7@204.953,4.826 U55.8@204.953,6.096 ; U55.8@205.003,6.147 205.003,24.054 203.86,25.197 201.727,25.197 200.401,26.522 ; 205.003,6.525 ccw(c205.382,6.525) U55.8@205.114,6.258
  Bottom Layer w0.254: P38.5@199.784,28.862 ccw(c198.221,30.425) D47.1@200.431,30.425 ; P38.5@199.964,28.682 ccw(c198.835,29.812) 200.431,29.812 ; D47.1@200.006,30.228 cw(c199.096,29.636) 200.145,29.355 ; D47.1@200.072,30.146 cw(c199.205,29.279) 200.431,29.279 cw(c201.658,29.279) D47.1@200.791,30.146 ; 200.147,29.364 cw(c201.263,29.065) D47.1@200.685,30.065 ; D47.1@200.177,30.065 cw(c199.664,29.176) 200.656,29.442 ; P38.5@200.431,28.275 D47.1@200.431,30.632 ; 200.431,29.667 ccw(c201.823,29.667) P38.5@200.839,28.682 ; D47.1@200.431,30.28 ccw(c202.437,30.28) P38.5@201.019,28.862 ; D47.1@200.54,29.875 cw(c201.072,30.018) D47.1@200.634,30.352 ; 200.674,29.375 cw(c201.594,29.621) D47.1@200.836,30.198
BY_KR1: D24.2 P39.1 | length 11.1
  Top Layer w0.254: D24.2@238.295,12.123 P39.1@241.84,12.123 ; D24.2@238.781,11.763 cw(c239.648,10.896) 239.648,12.123 cw(c239.648,13.349) D24.2@238.781,12.482 ; 239.706,12.123 ccw(c239.706,14.294) P39.1@241.241,12.759 ; 239.796,12.123 cw(c239.796,10.079) P39.1@241.241,11.524 ; 240.319,12.123 ccw(c240.319,13.681) P39.1@241.421,12.579 ; 240.409,12.123 cw(c240.409,10.692) P39.1@241.421,11.704
BY_KR2: D28.2 P39.2 | length 11.1
  Top Layer w0.254: D28.2@238.295,15.628 P39.2@241.845,15.628 ; D28.2@238.781,15.269 cw(c239.648,14.401) 239.648,15.628 cw(c239.648,16.854) D28.2@238.781,15.987 ; 239.719,15.628 ccw(c239.719,17.781) P39.2@241.241,16.259 ; 239.784,15.628 cw(c239.784,13.566) P39.2@241.241,15.024 ; 240.332,15.628 ccw(c240.332,17.168) P39.2@241.421,16.079 ; 240.397,15.628 cw(c240.397,14.179) P39.2@241.421,15.204
BY_KR3: D31.2 P39.3 | length 11.1
  Top Layer w0.254: D31.2@238.295,19.158 P39.3@241.842,19.158 ; D31.2@238.781,18.799 cw(c239.648,17.932) 239.648,19.158 cw(c239.648,20.385) D31.2@238.781,19.518 ; 239.71,19.158 cw(c239.71,16.992) P39.3@241.241,18.524 ; 239.793,19.158 ccw(c239.793,21.207) P39.3@241.241,19.759 ; 240.323,19.158 cw(c240.323,17.605) P39.3@241.421,18.704 ; 240.406,19.158 ccw(c240.406,20.594) P39.3@241.421,19.579
BZ1_KR1: D26.2 P41.3 | length 10.5
  Top Layer w0.254: P41.3@233.687,-57.218 ccw(c232.217,-55.748) 234.296,-55.748 ; P41.3@233.867,-57.398 ccw(c232.83,-56.361) 234.296,-56.361 ; D26.2@233.937,-55.393 cw(c233.07,-56.26) 234.296,-56.26 ; 234.296,-56.321 ccw(c235.819,-56.321) P41.3@234.742,-57.398 ; 234.296,-56.26 cw(c235.523,-56.26) D26.2@234.656,-55.393 ; 234.296,-55.708 ccw(c236.432,-55.708) P41.3@234.922,-57.218 ; D26.2@234.296,-54.907 234.296,-57.828 P41.3@234.305,-57.836
BZ1_KR2: D30.2 P41.4 | length 11.5
  Top Layer w0.254: P41.4@237.187,-57.218 ccw(c235.888,-55.92) 237.725,-55.92 ; D30.2@237.366,-55.393 cw(c236.499,-56.26) 237.725,-56.26 ; P41.4@237.367,-57.398 ccw(c236.502,-56.533) 237.725,-56.533 ; 237.725,-56.763 ccw(c238.877,-56.763) P41.4@238.063,-57.578 ; 237.725,-56.26 cw(c238.952,-56.26) D30.2@238.085,-55.393 ; 237.725,-56.15 ccw(c239.49,-56.15) P41.4@238.242,-57.398 ; D30.2@237.725,-55.537 ccw(c240.104,-55.537) P41.4@238.422,-57.218 ; D30.2@237.725,-54.907 237.725,-57.757 P41.4@237.805,-57.836
BZ2_KR1: D16.2 P40.3 | length 16.2
  Top Layer w0.254: P40.3@219.065,-57.836 221.469,-55.431 ; P40.3@219.065,-57.217 ccw(c219.065,-55.722) 220.121,-56.779 ccw(c221.178,-57.836) P40.3@219.684,-57.836 ; P40.3@219.065,-56.963 ccw(c219.065,-54.855) 220.555,-56.345 ccw(c222.045,-57.836) P40.3@219.938,-57.836 ; 220.142,-56.759 ccw(c218.163,-54.78) D16.2@220.961,-54.78 ; 220.575,-56.325 ccw(c219.03,-54.78) D16.2@221.215,-54.78 ; 221.009,-55.891 ccw(c219.897,-54.78) D16.2@221.469,-54.78 ; D16.2@221.346,-55.273 cw(c221.306,-55.431) 221.469,-55.431 ; 221.443,-55.458 ccw(c220.765,-54.78) D16.2@221.723,-54.78 ; D16.2@221.469,-54.653 221.469,-55.431 ; D16.2@221.593,-55.273 ccw(c221.633,-55.431) 221.469,-55.431
BZ2_KR2: D20.2 P40.4 | length 11.5
  Top Layer w0.254: P40.4@222.565,-57.836 224.39,-56.01 D20.2@224.39,-54.653 ; P40.4@222.565,-57.217 ccw(c222.565,-55.722) 223.621,-56.779 ccw(c224.678,-57.836) P40.4@223.184,-57.836 ; P40.4@222.565,-56.963 ccw(c222.565,-54.855) 224.055,-56.345 ccw(c225.545,-57.836) P40.4@223.438,-57.836 ; D20.2@224.031,-55.139 cw(c223.164,-56.006) 224.39,-56.006 ; 224.39,-56.006 cw(c225.617,-56.006) D20.2@224.75,-55.139
CDH1_KR1: P35.7 P56.8 PR1.4 | length 49.9
  Top Layer w0.254: P56.8@139.234,-59.925 ccw(c138.171,-58.862) 139.675,-58.862 ccw(c141.179,-58.862) P56.8@140.115,-59.925 ; P56.8@139.414,-60.105 ccw(c138.784,-59.475) 139.675,-59.475 ccw(c140.565,-59.475) P56.8@139.936,-60.105 ; P56.8@139.675,-60.366 139.675,-58.598 141.072,-57.201 165.767,-57.201 169.755,-53.213 P35.7@169.977,-53.213 169.977,-52.272 ; 168.534,-54.434 cw(c169.977,-55.876) P35.7@169.977,-53.836 ; 168.968,-54 cw(c169.977,-55.009) P35.7@169.977,-53.582 ; 169.07,-53.897 ccw(c168.386,-53.213) P35.7@169.354,-53.213 ; P35.7@169.734,-52.639 ccw(c169.578,-52.273) 169.977,-52.273 ; PR1.4@169.808,-47.528 cw(c169.634,-47.701) 169.88,-47.701 cw(c170.125,-47.701) PR1.4@169.952,-47.528 ; PR1.4@169.88,-47.177 169.88,-48.976 171.108,-50.205 171.108,-51.141 169.977,-52.272 ; P35.7@170.22,-52.639 cw(c170.375,-52.273) 169.977,-52.273
CDH1_KR2: P35.8 P56.7 PR1.3 | length 55.4
  Top Layer w0.254: P56.7@139.052,-62.906 ccw(c137.548,-62.906) 138.611,-61.842 ccw(c139.675,-60.779) P56.7@139.675,-62.283 ; P56.7@139.306,-62.906 ccw(c138.415,-62.906) 139.045,-62.276 ccw(c139.675,-61.646) P56.7@139.675,-62.537 ; P56.7@139.675,-62.906 138.405,-61.636 138.405,-58.717 140.429,-56.693 165.556,-56.693 168.568,-53.681 168.568,-52.082 P35.8@169.977,-50.673 169.041,-49.738 ; PR1.3@168.97,-47.528 cw(c168.796,-47.701) 169.041,-47.701 cw(c169.287,-47.701) PR1.3@169.113,-47.528 ; PR1.3@169.041,-47.177 169.041,-49.738 ; P35.8@169.354,-50.673 cw(c167.85,-50.673) 168.913,-51.737 cw(c169.977,-52.8) P35.8@169.977,-51.296 ; P35.8@169.357,-50.614 ccw(c168.269,-50.51) 169.042,-49.738 ; P35.8@169.608,-50.673 cw(c168.717,-50.673) 169.347,-51.303 cw(c169.977,-51.933) P35.8@169.977,-51.042 ; P35.8@169.609,-50.638 ccw(c168.965,-50.577) 169.423,-50.119 ccw(c169.88,-49.661) P35.8@169.942,-50.306 ; P35.8@169.918,-50.053 cw(c169.814,-48.965) 169.042,-49.738
CDH1_KR3: P35.5 P56.6 PR1.2 | length 46.6
  Top Layer w0.254: P56.6@136.808,-59.835 ccw(c136.474,-59.291) 137.113,-59.291 ; P56.6@137.135,-60.366 137.113,-60.344 137.113,-59.291 ; P56.6@137.428,-59.816 cw(c137.708,-59.291) 137.113,-59.291 ; 166.242,-54.592 ccw(c164.863,-53.213) P35.5@166.814,-53.213 ; 166.676,-54.159 ccw(c165.73,-53.213) P35.5@167.068,-53.213 ; 166.689,-54.146 cw(c167.437,-54.893) P35.5@167.437,-53.836 ; P35.5@167.705,-52.651 ccw(c167.84,-52.37) 168.06,-52.59 ; P35.5@167.999,-52.944 cw(c168.28,-52.81) 168.06,-52.59 ; PR1.2@168.131,-47.528 cw(c167.958,-47.701) 168.203,-47.701 cw(c168.449,-47.701) PR1.2@168.275,-47.528 ; PR1.2@168.203,-47.177 168.203,-49.84 168.568,-50.205 168.568,-51.364 168.06,-51.872 168.06,-52.59 ; 137.113,-59.291 140.219,-56.185 164.65,-56.185 167.437,-53.398 P35.5@167.437,-53.213 168.06,-52.59
CDH1_KR4: P35.6 P56.5 PR1.1 | length 54.8
  Top Layer w0.254: P56.5@136.512,-62.906 ccw(c135.008,-62.906) 136.071,-61.842 ccw(c137.135,-60.779) P56.5@137.135,-62.283 ; P56.5@136.766,-62.906 ccw(c135.875,-62.906) 136.505,-62.276 ccw(c137.135,-61.646) P56.5@137.135,-62.537 ; P56.5@137.135,-62.906 135.865,-61.636 135.865,-59.82 140.008,-55.677 164.44,-55.677 166.218,-53.899 166.218,-51.892 P35.6@167.437,-50.673 167.365,-50.601 PR1.1@167.365,-47.177 ; P35.6@166.814,-50.673 cw(c165.31,-50.673) 166.373,-51.737 cw(c167.437,-52.8) P35.6@167.437,-51.296 ; P35.6@166.996,-50.232 ccw(c166.106,-49.342) 167.365,-49.342 ; P35.6@167.068,-50.673 cw(c166.177,-50.673) 166.807,-51.303 cw(c167.437,-51.933) P35.6@167.437,-51.042 ; PR1.1@167.293,-47.528 cw(c167.12,-47.701) 167.365,-47.701 cw(c167.61,-47.701) PR1.1@167.437,-47.528 ; 167.365,-49.609 ccw(c168.501,-49.609) P35.6@167.698,-50.412 ; 167.365,-48.996 ccw(c169.114,-48.996) P35.6@167.877,-50.232
CDH1_KR5: P35.3 P56.4 PR2.4 | length 53.4
  Top Layer w0.254: P56.4@134.317,-59.808 ccw(c134.094,-59.36) 134.595,-59.36 ; P56.4@134.595,-60.366 134.595,-59.36 ; P56.4@134.872,-59.808 cw(c135.095,-59.36) 134.595,-59.36 ; 163.492,-55.1 ccw(c161.605,-53.213) P35.3@164.274,-53.213 ; 163.926,-54.667 ccw(c162.472,-53.213) P35.3@164.528,-53.213 ; 164.359,-54.233 ccw(c163.339,-53.213) P35.3@164.782,-53.213 ; 164.657,-53.935 cw(c164.897,-54.175) P35.3@164.897,-53.836 ; PR2.4@164.728,-47.528 cw(c164.554,-47.701) 164.8,-47.701 cw(c165.045,-47.701) PR2.4@164.872,-47.528 ; P35.3@164.761,-53.241 cw(c165.705,-53.049) 165.024,-52.368 ; PR2.4@164.8,-47.177 164.8,-48.976 166.028,-50.205 166.028,-51.364 ; P35.3@165.01,-53.19 cw(c166.262,-52.937) 165.358,-52.033 ; P35.3@165.258,-53.14 cw(c166.819,-52.824) 165.693,-51.698 ; P35.3@165.507,-53.089 cw(c167.375,-52.711) 166.028,-51.364 ; 134.595,-59.36 135.357,-58.598 136.369,-58.598 139.798,-55.169 163.424,-55.169 164.897,-53.696 P35.3@164.897,-53.213 164.897,-52.495 166.028,-51.364
CDH1_KR6: P35.4 P56.3 PR2.3 | length 55.5
  Top Layer w0.254: P56.3@133.972,-62.906 ccw(c132.468,-62.906) 133.531,-61.842 ccw(c134.595,-60.779) P56.3@134.595,-62.283 ; P56.3@134.226,-62.906 ccw(c133.335,-62.906) 133.965,-62.276 ccw(c134.595,-61.646) P56.3@134.595,-62.537 ; P56.3@134.595,-62.906 133.325,-61.636 133.325,-59.106 134.341,-58.09 136.158,-58.09 139.587,-54.661 163.043,-54.661 163.678,-54.026 163.678,-51.892 P35.4@164.897,-50.673 163.961,-49.738 ; PR2.3@163.89,-47.528 cw(c163.716,-47.701) 163.961,-47.701 cw(c164.207,-47.701) PR2.3@164.033,-47.528 ; PR2.3@163.961,-47.177 163.961,-49.738 ; P35.4@164.274,-50.673 cw(c162.77,-50.673) 163.833,-51.737 cw(c164.897,-52.8) P35.4@164.897,-51.296 ; P35.4@164.277,-50.614 ccw(c163.189,-50.51) 163.962,-49.738 ; P35.4@164.528,-50.673 cw(c163.637,-50.673) 164.267,-51.303 cw(c164.897,-51.933) P35.4@164.897,-51.042 ; P35.4@164.529,-50.638 ccw(c163.885,-50.577) 164.343,-50.119 ccw(c164.8,-49.661) P35.4@164.862,-50.306 ; P35.4@164.838,-50.053 cw(c164.734,-48.965) 163.962,-49.738
CDH1_KR7: P35.1 P56.2 PR2.2 | length 55
  Top Layer w0.254: P56.2@131.614,-59.925 ccw(c130.551,-58.862) 132.055,-58.862 ccw(c133.559,-58.862) P56.2@132.495,-59.925 ; P56.2@131.794,-60.105 ccw(c131.164,-59.475) 132.055,-59.475 ccw(c132.945,-59.475) P56.2@132.316,-60.105 ; P56.2@132.055,-60.366 132.055,-58.852 133.325,-57.582 135.948,-57.582 139.377,-54.153 161.417,-54.153 ; P35.1@161.736,-53.27 cw(c160.635,-53.371) 161.417,-54.153 ; P35.1@161.989,-53.247 cw(c161.337,-53.306) 161.8,-53.77 cw(c162.263,-54.233) P35.1@162.323,-53.58 ; P35.1@162.23,-52.603 ccw(c162.003,-51.506) 163.123,-51.506 ; P35.1@162.282,-52.852 ccw(c162.068,-51.818) 163.123,-51.818 ; P35.1@162.3,-53.833 ccw(c162.199,-54.935) 161.417,-54.153 ; P35.1@162.333,-53.1 ccw(c162.132,-52.13) 163.123,-52.13 ; P35.1@162.385,-53.349 ccw(c162.197,-52.442) 163.123,-52.442 ; P35.1@162.516,-52.611 ccw(c162.677,-52) 163.123,-52.447 ccw(c163.57,-52.893) P35.1@162.959,-53.054 ; PR2.2@163.051,-47.528 cw(c162.878,-47.701) 163.123,-47.701 cw(c163.369,-47.701) PR2.2@163.195,-47.528 ; PR2.2@163.123,-47.177 163.123,-49.84 163.488,-50.205 163.488,-51.141 163.123,-51.506 ; 161.417,-54.153 P35.1@162.357,-53.213 163.123,-52.447 163.123,-51.506
CDH1_KR8: P35.2 P56.1 PR2.1 | length 54
  Top Layer w0.254: P56.1@131.502,-63.193 ccw(c131.029,-63.439) 131.029,-62.906 ; P56.1@131.502,-62.618 cw(c131.029,-62.373) 131.029,-62.906 ; P56.1@132.055,-62.906 131.029,-62.906 ; P35.2@161.734,-50.673 cw(c160.23,-50.673) 161.293,-51.737 cw(c162.357,-52.8) P35.2@162.357,-51.296 ; P35.2@161.916,-50.232 ccw(c161.026,-49.342) 162.285,-49.342 ; P35.2@161.988,-50.673 cw(c161.097,-50.673) 161.727,-51.303 cw(c162.357,-51.933) P35.2@162.357,-51.042 ; PR2.1@162.213,-47.528 cw(c162.04,-47.701) 162.285,-47.701 cw(c162.53,-47.701) PR2.1@162.357,-47.528 ; P35.2@162.285,-50.601 PR2.1@162.285,-47.177 ; 162.285,-49.609 ccw(c163.421,-49.609) P35.2@162.618,-50.412 ; 162.285,-48.996 ccw(c164.034,-48.996) P35.2@162.797,-50.232 ; P35.2@162.357,-50.673 161.011,-52.019 161.011,-53.137 160.503,-53.645 139.167,-53.645 135.738,-57.074 131.547,-57.074 130.023,-58.598 130.023,-61.9 131.029,-62.906
CDH2_KR1: P35.15 P57.8 PR3.4 | length 40.6
  Top Layer w0.254: P57.8@160.376,-60.989 cw(c160.376,-62.493) 161.439,-61.429 cw(c162.503,-60.366) P57.8@160.999,-60.366 ; P57.8@160.376,-60.735 cw(c160.376,-61.626) 161.006,-60.996 cw(c161.635,-60.366) P57.8@160.745,-60.366 ; P57.8@160.376,-60.366 161.656,-61.646 163.957,-61.646 165.43,-63.119 167.802,-63.119 174.031,-56.89 176.238,-56.89 179.915,-53.213 P35.15@180.137,-53.213 180.137,-52.272 ; 178.694,-54.434 cw(c180.137,-55.876) P35.15@180.137,-53.836 ; 179.128,-54 cw(c180.137,-55.009) P35.15@180.137,-53.582 ; 179.23,-53.897 ccw(c178.546,-53.213) P35.15@179.514,-53.213 ; P35.15@179.894,-52.639 ccw(c179.738,-52.273) 180.137,-52.273 ; PR3.4@179.968,-47.528 cw(c179.794,-47.701) 180.04,-47.701 cw(c180.285,-47.701) PR3.4@180.112,-47.528 ; PR3.4@180.04,-47.177 180.04,-48.976 181.268,-50.205 181.268,-51.141 180.137,-52.272 ; P35.15@180.38,-52.639 cw(c180.535,-52.273) 180.137,-52.273
CDH2_KR2: P35.16 P57.7 PR3.3 | length 49.9
  Top Layer w0.254: v1(166.497,-62.23) 167.973,-62.23 173.821,-56.382 176.027,-56.382 178.728,-53.681 178.728,-52.082 P35.16@180.137,-50.673 179.201,-49.738 ; v1@166.69,-62.423 cw(c167.156,-62.889) 167.156,-62.23 cw(c167.156,-61.571) v1@166.69,-62.037 ; PR3.3@179.13,-47.528 cw(c178.956,-47.701) 179.201,-47.701 cw(c179.447,-47.701) PR3.3@179.273,-47.528 ; PR3.3@179.201,-47.177 179.201,-49.738 ; P35.16@179.514,-50.673 cw(c178.01,-50.673) 179.073,-51.737 cw(c180.137,-52.8) P35.16@180.137,-51.296 ; P35.16@179.517,-50.614 ccw(c178.429,-50.51) 179.202,-49.738 ; P35.16@179.768,-50.673 cw(c178.877,-50.673) 179.507,-51.303 cw(c180.137,-51.933) P35.16@180.137,-51.042 ; P35.16@179.769,-50.638 ccw(c179.125,-50.577) 179.583,-50.119 ccw(c180.04,-49.661) P35.16@180.102,-50.306 ; P35.16@180.078,-50.053 cw(c179.974,-48.965) 179.202,-49.738
  Bottom Layer w0.254: P57.7@159.753,-62.906 ccw(c158.249,-62.906) 159.312,-61.842 ccw(c160.376,-60.779) P57.7@160.376,-62.283 ; P57.7@160.007,-62.906 ccw(c159.116,-62.906) 159.746,-62.276 ccw(c160.376,-61.646) P57.7@160.376,-62.537 ; P57.7@160.376,-62.906 159.156,-61.687 159.156,-59.792 159.918,-59.03 164.948,-59.03 165.722,-59.804 165.722,-61.455 v1(166.497,-62.23) ; v1@166.224,-62.23 ccw(c165.565,-62.23) 166.031,-61.764 ccw(c166.497,-61.298) v1@166.497,-61.957
CDH2_KR3: P35.13 P57.6 PR3.2 | length 42.7
  Top Layer w0.254: v1(167.767,-61.087) 168.398,-61.087 ; v1@167.966,-61.274 cw(c168.398,-61.679) 168.398,-61.087 ; v1@167.966,-60.9 ccw(c168.398,-60.495) 168.398,-61.087 ; P35.13@176.974,-53.213 cw(c175.47,-53.213) 176.533,-54.277 cw(c177.597,-55.34) P35.13@177.597,-53.836 ; P35.13@177.228,-53.213 cw(c176.337,-53.213) 176.967,-53.843 cw(c177.597,-54.473) P35.13@177.597,-53.582 ; P35.13@177.865,-52.651 ccw(c178,-52.37) 178.22,-52.59 ; P35.13@178.159,-52.944 cw(c178.44,-52.81) 178.22,-52.59 ; PR3.2@178.291,-47.528 cw(c178.118,-47.701) 178.363,-47.701 cw(c178.609,-47.701) PR3.2@178.435,-47.528 ; PR3.2@178.363,-47.177 178.363,-49.84 178.728,-50.205 178.728,-51.364 178.22,-51.872 178.22,-52.59 ; 168.398,-61.087 173.61,-55.874 174.936,-55.874 P35.13@177.597,-53.213 178.22,-52.59
  Bottom Layer w0.254: P57.6@157.836,-60.366 157.864,-60.366 159.708,-58.522 165.158,-58.522 166.23,-59.594 166.23,-60.503 166.814,-61.087 v1(167.767,-61.087) ; P57.6@157.836,-59.997 ccw(c157.836,-59.038) 158.514,-59.716 ; P57.6@157.836,-59.743 ccw(c157.836,-58.171) 158.947,-59.282 ; P57.6@158.205,-60.366 cw(c159.027,-60.366) 158.446,-59.784 ; P57.6@158.459,-60.366 cw(c159.895,-60.366) 158.879,-59.35 ; v1@167.574,-61.28 ccw(c167.108,-61.746) 167.108,-61.087 ccw(c167.108,-60.428) v1@167.574,-60.894
CDH2_KR4: P35.14 P57.5 PR3.1 | length 47.5
  Top Layer w0.254: v1(167.386,-60.02) 168.746,-60.02 173.4,-55.366 174.503,-55.366 176.188,-53.681 176.188,-52.082 P35.14@177.597,-50.673 177.525,-50.601 PR3.1@177.525,-47.177 ; v1@167.579,-60.213 cw(c168.045,-60.679) 168.045,-60.02 cw(c168.045,-59.361) v1@167.579,-59.827 ; P35.14@176.974,-50.673 cw(c175.47,-50.673) 176.533,-51.737 cw(c177.597,-52.8) P35.14@177.597,-51.296 ; P35.14@177.156,-50.232 ccw(c176.266,-49.342) 177.525,-49.342 ; P35.14@177.228,-50.673 cw(c176.337,-50.673) 176.967,-51.303 cw(c177.597,-51.933) P35.14@177.597,-51.042 ; PR3.1@177.453,-47.528 cw(c177.28,-47.701) 177.525,-47.701 cw(c177.77,-47.701) PR3.1@177.597,-47.528 ; 177.525,-49.609 ccw(c178.661,-49.609) P35.14@177.858,-50.412 ; 177.525,-48.996 ccw(c179.274,-48.996) P35.14@178.037,-50.232
  Bottom Layer w0.254: P57.5@157.213,-62.906 ccw(c155.709,-62.906) 156.772,-61.842 ccw(c157.836,-60.779) P57.5@157.836,-62.283 ; P57.5@157.467,-62.906 ccw(c156.576,-62.906) 157.206,-62.276 ccw(c157.836,-61.646) P57.5@157.836,-62.537 ; P57.5@157.836,-62.906 156.705,-61.775 156.705,-59.897 158.588,-58.014 165.368,-58.014 167.375,-60.02 v1(167.386,-60.02) ; 166.901,-59.546 ccw(c167.386,-59.062) v1@167.386,-59.747 ; 166.928,-59.573 cw(c166.48,-60.02) v1@167.113,-60.02
CDH2_KR5: P35.11 P57.4 PR4.4 | length 38.3
  Top Layer w0.254: P57.4@155.296,-60.366 156.429,-59.233 168.815,-59.233 174.835,-53.213 P35.11@175.057,-53.213 175.057,-52.272 ; P57.4@155.296,-59.997 ccw(c155.296,-59.106) 155.926,-59.736 ccw(c156.555,-60.366) P57.4@155.665,-60.366 ; P57.4@155.296,-59.743 ccw(c155.296,-58.239) 156.359,-59.302 ccw(c157.423,-60.366) P57.4@155.919,-60.366 ; 173.614,-54.434 cw(c175.057,-55.876) P35.11@175.057,-53.836 ; 174.048,-54 cw(c175.057,-55.009) P35.11@175.057,-53.582 ; 174.15,-53.897 ccw(c173.466,-53.213) P35.11@174.434,-53.213 ; P35.11@174.814,-52.639 ccw(c174.658,-52.273) 175.057,-52.273 ; PR4.4@174.888,-47.528 cw(c174.714,-47.701) 174.96,-47.701 cw(c175.205,-47.701) PR4.4@175.032,-47.528 ; PR4.4@174.96,-47.177 174.96,-48.976 176.188,-50.205 176.188,-51.141 175.057,-52.272 ; P35.11@175.3,-52.639 cw(c175.455,-52.273) 175.057,-52.273
CDH2_KR6: P35.12 P57.3 PR4.3 | length 44.3
  Top Layer w0.254: P57.3@154.673,-62.906 ccw(c153.169,-62.906) 154.232,-61.842 ccw(c155.296,-60.779) P57.3@155.296,-62.283 ; P57.3@154.927,-62.906 ccw(c154.036,-62.906) 154.666,-62.276 ccw(c155.296,-61.646) P57.3@155.296,-62.537 ; P57.3@155.296,-62.906 154.026,-61.636 154.026,-59.741 155.042,-58.725 168.604,-58.725 173.648,-53.681 173.648,-52.082 P35.12@175.057,-50.673 174.121,-49.738 ; PR4.3@174.05,-47.528 cw(c173.876,-47.701) 174.121,-47.701 cw(c174.367,-47.701) PR4.3@174.193,-47.528 ; PR4.3@174.121,-47.177 174.121,-49.738 ; P35.12@174.434,-50.673 cw(c172.93,-50.673) 173.993,-51.737 cw(c175.057,-52.8) P35.12@175.057,-51.296 ; P35.12@174.437,-50.614 ccw(c173.349,-50.51) 174.122,-49.738 ; P35.12@174.688,-50.673 cw(c173.797,-50.673) 174.427,-51.303 cw(c175.057,-51.933) P35.12@175.057,-51.042 ; P35.12@174.689,-50.638 ccw(c174.045,-50.577) 174.503,-50.119 ccw(c174.96,-49.661) P35.12@175.022,-50.306 ; P35.12@174.998,-50.053 cw(c174.894,-48.965) 174.122,-49.738
CDH2_KR7: P35.9 P57.2 PR4.2 | length 36.4
  Top Layer w0.254: P57.2@152.422,-59.84 ccw(c152.037,-59.233) 152.756,-59.233 ; P57.2@152.756,-60.366 152.756,-59.233 ; P57.2@153.089,-59.84 cw(c153.474,-59.233) 152.756,-59.233 ; P35.9@171.894,-53.213 cw(c170.39,-53.213) 171.453,-54.277 cw(c172.517,-55.34) P35.9@172.517,-53.836 ; P35.9@172.148,-53.213 cw(c171.257,-53.213) 171.887,-53.843 cw(c172.517,-54.473) P35.9@172.517,-53.582 ; P35.9@172.785,-52.651 ccw(c172.92,-52.37) 173.14,-52.59 ; P35.9@173.079,-52.944 cw(c173.36,-52.81) 173.14,-52.59 ; PR4.2@173.211,-47.528 cw(c173.038,-47.701) 173.283,-47.701 cw(c173.529,-47.701) PR4.2@173.355,-47.528 ; PR4.2@173.283,-47.177 173.283,-49.84 173.648,-50.205 173.648,-51.364 173.14,-51.872 173.14,-52.59 ; 152.756,-59.233 153.772,-58.217 167.513,-58.217 P35.9@172.517,-53.213 173.14,-52.59
CDH2_KR8: P35.10 P57.1 PR4.1 | length 43.8
  Top Layer w0.254: P57.1@152.234,-63.247 ccw(c151.603,-63.661) 151.603,-62.906 ; P57.1@152.234,-62.564 cw(c151.603,-62.15) 151.603,-62.906 ; P57.1@152.756,-62.906 151.603,-62.906 ; P35.10@171.894,-50.673 cw(c170.39,-50.673) 171.453,-51.737 cw(c172.517,-52.8) P35.10@172.517,-51.296 ; P35.10@172.076,-50.232 ccw(c171.186,-49.342) 172.445,-49.342 ; P35.10@172.148,-50.673 cw(c171.257,-50.673) 171.887,-51.303 cw(c172.517,-51.933) P35.10@172.517,-51.042 ; PR4.1@172.373,-47.528 cw(c172.2,-47.701) 172.445,-47.701 cw(c172.69,-47.701) PR4.1@172.517,-47.528 ; P35.10@172.445,-50.601 PR4.1@172.445,-47.177 ; 172.445,-49.609 ccw(c173.581,-49.609) P35.10@172.778,-50.412 ; 172.445,-48.996 ccw(c174.194,-48.996) P35.10@172.957,-50.232 ; P35.10@172.517,-50.673 171.108,-52.082 171.108,-53.681 167.08,-57.709 151.994,-57.709 150.851,-58.852 150.851,-62.154 151.603,-62.906
CDH3_KR1: P35.23 P58.8 PR5.4 | length 24.7
  Top Layer w0.254: P58.8@181.204,-60.366 181.322,-60.366 183.227,-58.462 185.048,-58.462 P35.23@190.297,-53.213 191.11,-52.4 ; P35.23@189.674,-53.213 cw(c188.17,-53.213) 189.233,-54.277 cw(c190.297,-55.34) P35.23@190.297,-53.836 ; P35.23@189.928,-53.213 cw(c189.037,-53.213) 189.667,-53.843 cw(c190.297,-54.473) P35.23@190.297,-53.582 ; PR5.4@190.128,-47.528 cw(c189.954,-47.701) 190.2,-47.701 cw(c190.445,-47.701) PR5.4@190.272,-47.528 ; PR5.4@190.2,-47.177 190.2,-48.976 191.428,-50.205 191.428,-51.364 191.11,-51.682 191.11,-52.4 ; P35.23@190.425,-52.603 ccw(c190.58,-51.871) 191.11,-52.4 ; P35.23@190.906,-53.084 cw(c191.639,-52.93) 191.11,-52.4
CDH3_KR2: P35.24 P58.7 PR5.3 | length 30.3
  Top Layer w0.254: v1(185.318,-56.896) 187.87,-54.344 188.225,-54.344 188.888,-53.681 188.888,-53.023 190.297,-51.614 ; v1@185.318,-56.623 ccw(c185.318,-55.964) 185.784,-56.43 ccw(c186.25,-56.896) v1@185.591,-56.896 ; PR5.3@189.29,-47.528 cw(c189.116,-47.701) 189.361,-47.701 cw(c189.607,-47.701) PR5.3@189.433,-47.528 ; PR5.3@189.361,-47.177 189.361,-49.738 ; P35.24@189.677,-50.614 ccw(c188.589,-50.51) 189.362,-49.738 ; P35.24@189.929,-50.638 ccw(c189.285,-50.577) 189.743,-50.119 ccw(c190.2,-49.661) P35.24@190.262,-50.306 ; P35.24@190.054,-51.247 cw(c189.898,-51.613) 190.297,-51.613 ; P35.24@190.238,-50.053 cw(c190.134,-48.965) 189.362,-49.738 ; P35.24@190.54,-51.247 ccw(c190.695,-51.613) 190.297,-51.613 ; 189.361,-49.738 P35.24@190.297,-50.673 190.297,-51.614
  Bottom Layer w0.254: P58.7@181.204,-62.906 182.575,-61.534 182.575,-59.639 v1(185.318,-56.896) ; P58.7@181.204,-62.537 ccw(c181.204,-61.646) 181.834,-62.276 ccw(c182.463,-62.906) P58.7@181.573,-62.906 ; P58.7@181.204,-62.283 ccw(c181.204,-60.779) 182.267,-61.842 ccw(c183.331,-62.906) P58.7@181.827,-62.906 ; v1@185.045,-56.896 cw(c184.386,-56.896) 184.852,-57.362 cw(c185.318,-57.828) v1@185.318,-57.169
CDH3_KR3: P35.21 P58.6 PR5.2 | length 27.6
  Top Layer w0.254: P58.6@178.664,-60.366 179.604,-60.366 ; P58.6@179.237,-60.609 cw(c179.604,-60.764) 179.604,-60.366 ; P58.6@179.237,-60.123 ccw(c179.604,-59.967) 179.604,-60.366 ; P35.21@187.134,-53.213 cw(c185.63,-53.213) 186.693,-54.277 cw(c187.757,-55.34) P35.21@187.757,-53.836 ; P35.21@187.388,-53.213 cw(c186.497,-53.213) 187.127,-53.843 cw(c187.757,-54.473) P35.21@187.757,-53.582 ; P35.21@187.757,-52.844 ccw(c187.757,-51.953) 188.387,-52.583 ccw(c189.017,-53.213) P35.21@188.126,-53.213 ; P35.21@187.757,-52.59 ccw(c187.757,-51.086) 188.82,-52.149 ccw(c189.884,-53.213) P35.21@188.38,-53.213 ; PR5.2@188.451,-47.528 cw(c188.278,-47.701) 188.523,-47.701 cw(c188.769,-47.701) PR5.2@188.595,-47.528 ; PR5.2@188.523,-47.177 188.523,-49.84 188.888,-50.205 188.888,-52.082 P35.21@187.757,-53.213 181.735,-59.235 180.735,-59.235 179.604,-60.366
CDH3_KR4: P35.22 P58.5 PR5.1 | length 30.2
  Top Layer w0.254: v1(182.728,-56.82) 185.203,-54.344 185.685,-54.344 186.348,-53.681 186.348,-53.023 187.757,-51.614 ; v1@182.728,-56.547 ccw(c182.728,-55.888) 183.194,-56.354 ccw(c183.66,-56.82) v1@183.001,-56.82 ; P35.22@187.316,-50.232 ccw(c186.426,-49.342) 187.685,-49.342 ; P35.22@187.514,-51.247 cw(c187.358,-51.613) 187.757,-51.613 ; PR5.1@187.613,-47.528 cw(c187.44,-47.701) 187.685,-47.701 cw(c187.93,-47.701) PR5.1@187.757,-47.528 ; 187.685,-49.609 ccw(c188.821,-49.609) P35.22@188.018,-50.412 ; 187.685,-48.996 ccw(c189.434,-48.996) P35.22@188.197,-50.232 ; PR5.1@187.685,-47.177 187.685,-50.601 P35.22@187.757,-50.673 187.757,-51.614 ; P35.22@188,-51.247 ccw(c188.155,-51.613) 187.757,-51.613
  Bottom Layer w0.254: P58.5@178.664,-62.906 179.984,-61.585 179.984,-59.563 v1(182.728,-56.82) ; P58.5@178.664,-62.537 ccw(c178.664,-61.646) 179.294,-62.276 ccw(c179.923,-62.906) P58.5@179.033,-62.906 ; P58.5@178.664,-62.283 ccw(c178.664,-60.779) 179.727,-61.842 ccw(c180.791,-62.906) P58.5@179.287,-62.906 ; v1@182.455,-56.82 cw(c181.796,-56.82) 182.262,-57.286 cw(c182.728,-57.752) v1@182.728,-57.093
CDH3_KR5: P35.19 P58.4 PR6.4 | length 30.6
  Top Layer w0.254: P58.4@176.124,-60.366 176.124,-59.938 177.14,-58.922 ; P58.4@176.124,-59.743 ccw(c176.124,-59.271) 176.457,-59.605 ; P58.4@176.236,-60.344 cw(c177.052,-60.185) 176.464,-59.597 ; P58.4@176.486,-60.295 cw(c177.617,-60.075) 176.802,-59.26 ; P58.4@176.735,-60.247 cw(c178.182,-59.964) 177.14,-58.922 ; 183.774,-54.434 cw(c185.217,-55.876) P35.19@185.217,-53.836 ; 184.208,-54 cw(c185.217,-55.009) P35.19@185.217,-53.582 ; 184.31,-53.897 ccw(c183.626,-53.213) P35.19@184.594,-53.213 ; PR6.4@185.175,-47.528 cw(c185.001,-47.701) 185.247,-47.701 cw(c185.492,-47.701) PR6.4@185.319,-47.528 ; P35.19@185.217,-52.844 ccw(c185.217,-51.953) 185.847,-52.583 ccw(c186.477,-53.213) P35.19@185.586,-53.213 ; P35.19@185.217,-52.59 ccw(c185.217,-51.086) 186.28,-52.149 ccw(c187.344,-53.213) P35.19@185.84,-53.213 ; PR6.4@185.247,-47.177 185.247,-49.103 186.348,-50.205 186.348,-52.082 P35.19@185.217,-53.213 184.995,-53.213 179.286,-58.922 177.14,-58.922
CDH3_KR6: P35.20 P58.3 PR6.3 | length 32.2
  Top Layer w0.254: P58.3@175.501,-62.906 ccw(c173.997,-62.906) 175.06,-61.842 ccw(c176.124,-60.779) P58.3@176.124,-62.283 ; P58.3@175.755,-62.906 ccw(c174.864,-62.906) 175.494,-62.276 ccw(c176.124,-61.646) P58.3@176.124,-62.537 ; P58.3@176.124,-62.906 174.854,-61.636 174.854,-59.36 175.799,-58.414 179.075,-58.414 183.808,-53.681 183.808,-52.082 P35.20@185.217,-50.673 184.408,-49.865 ; PR6.3@184.337,-47.528 cw(c184.163,-47.701) 184.408,-47.701 cw(c184.654,-47.701) PR6.3@184.48,-47.528 ; PR6.3@184.408,-47.177 184.408,-49.865 ; P35.20@184.594,-50.673 cw(c183.09,-50.673) 184.153,-51.737 cw(c185.217,-52.8) P35.20@185.217,-51.296 ; P35.20@184.608,-50.542 ccw(c183.887,-50.386) 184.408,-49.865 ; P35.20@184.848,-50.673 cw(c183.957,-50.673) 184.587,-51.303 cw(c185.217,-51.933) P35.20@185.217,-51.042 ; P35.20@185.085,-50.064 cw(c184.93,-49.343) 184.408,-49.865